# Altium PCB PCB2.PcbDoc
Units mm, origin at the board's own origin, x right, y up, seen from the top; angles counter-clockwise.
Board outline 152.4 x 72.9 mm, 2 copper layers (Top Layer, Bottom Layer); 42 components, 55 nets, 182 pads, 0 vias.
Unrouted connection lines stored in the file: 91.
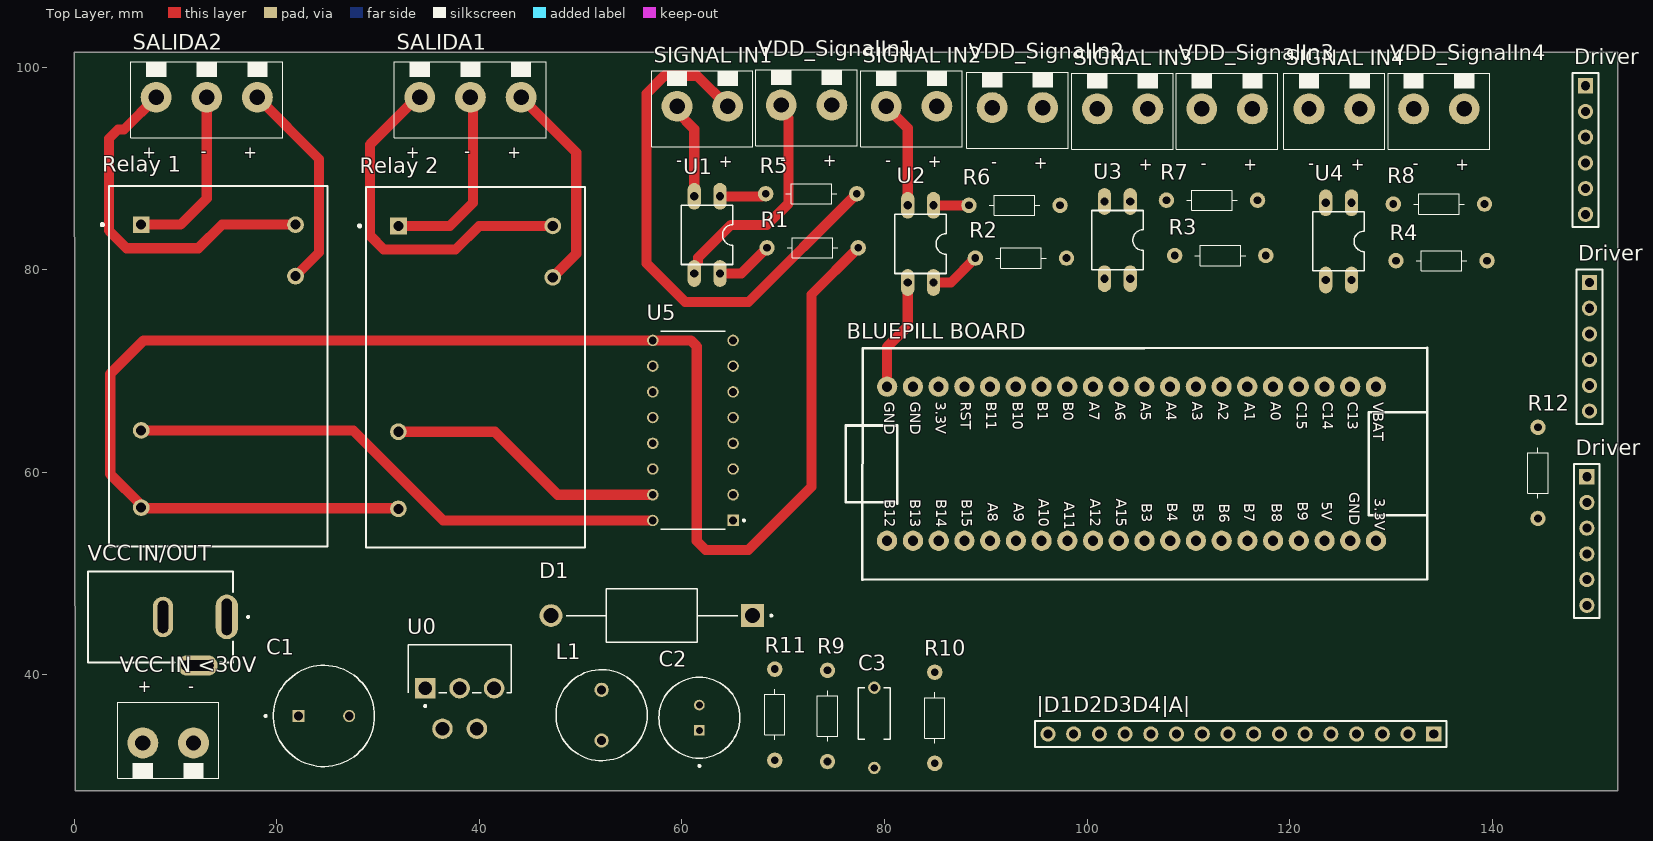
[diagram p0: Top Layer view]
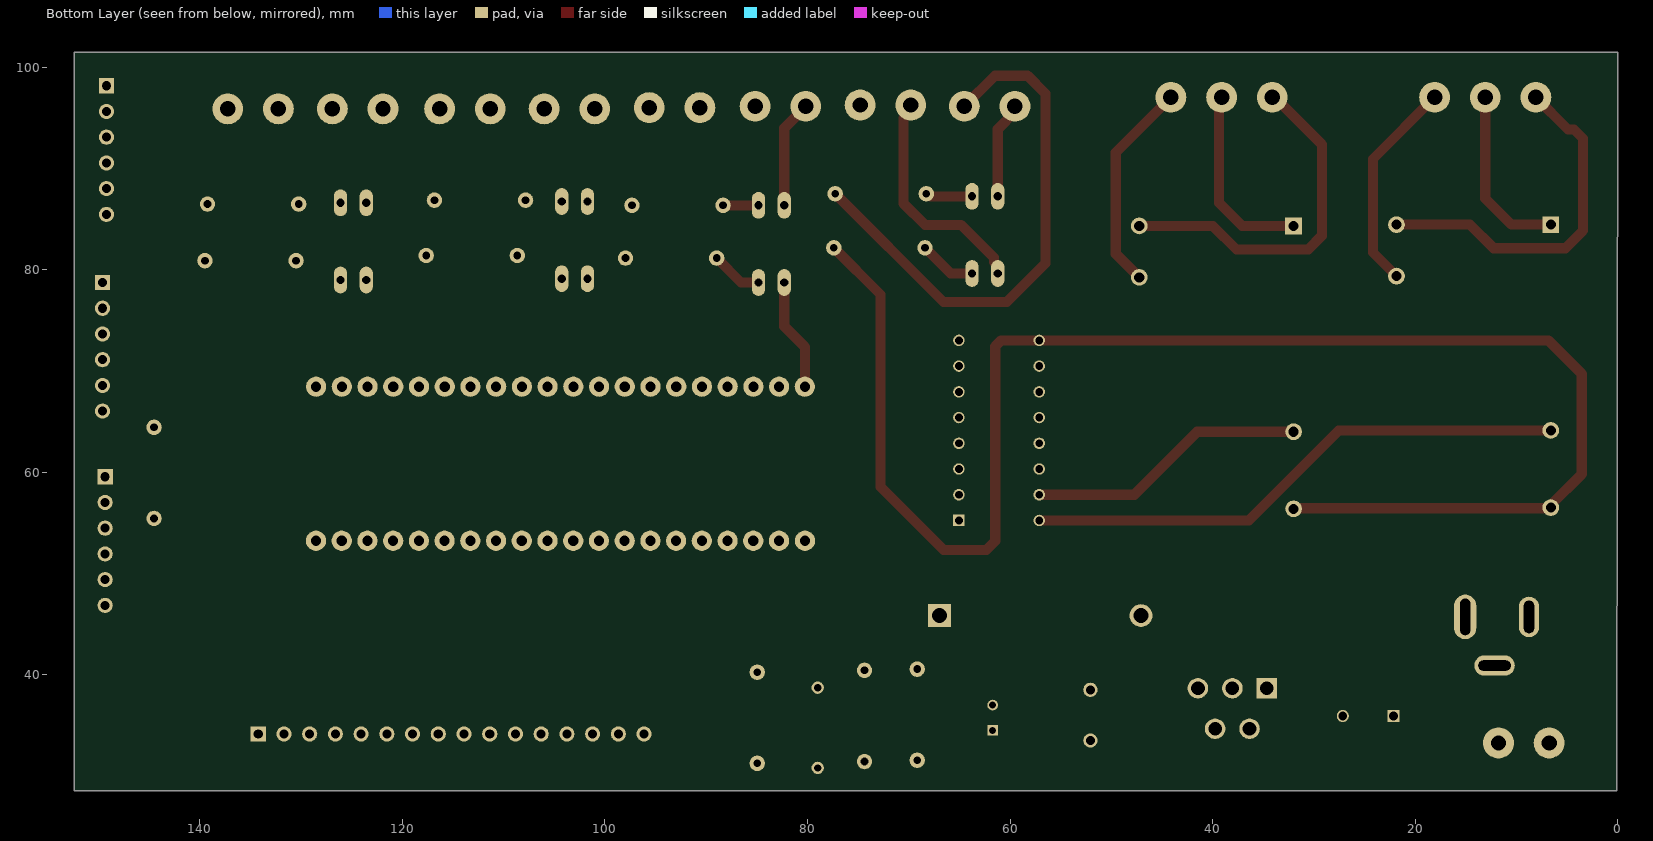
[diagram p1: Bottom Layer view, seen from below]

## Layer stack, top to bottom
Top Solder: solder mask 0.0102, Solder Resist, Dk 3.5
Top Layer: signal copper 0.0356
Dielectric 1: dielectric 0.32, FR-4, Dk 4.8
Bottom Layer: signal copper 0.0356
Bottom Solder: solder mask 0.0102, Solder Resist, Dk 3.5

## Board outline
0,101.473 152.4,101.473 152.4,28.575 0.107,28.575

## Design rules (kind name [scope] priority, off if disabled: settings)
Clearance [All] p1: gap=1 ignorepadtopadclearanceinfootprint=FALSE except(0: Arc-Hole Track-Hole SMDPad-Hole THPad-Hole Via-Hole Fill-Hole Poly-Hole Region-Hole Text-Hole)
PolygonConnect [All] p1: connectstyle=Relief reliefconductorwidth=0.254 reliefentries=4 polygonreliefangle="90 Angle" airgapwidth=0.254
RoomDefinition Placa_Main [InComponentClass('Placa_Main')] p1: confinementstyle=ConfineIn formatcopy=TRUE lockcomponents=FALSE outline 0.167,28.702 152.313,28.702 152.313,101.473 0.167,101.473
RoutingVias [All] p1: holewidth=0.711 width=1.27 viastyle="Through Hole" minholewidth=0.711 minwidth=1.27 maxholewidth=0.711 maxwidth=1.27
SolderMaskExpansion [All] p1: expansion=0.102 istentingtop=FALSE
Width [All] p1: maxlimit=3 minlimit=1 preferedwidth=1 minimp=50.000000 maximp=50.000000 favimp=50.000000
30 further rules are at their usual default settings.

## Classes and differential pairs
component class Placa_Main: "BLUEPILL BOARD" C1 C2 C3 D1 "Driver M2" "Driver M3" L1 R1 R2 R3 R4 R5 R6 R7 R8 R9 R10 R11 R12 "Relay 2" SALIDA1 SALIDA2 "SIGNAL IN1" "SIGNAL IN2" "SIGNAL IN3" "SIGNAL IN4" U0 U1 U2 U3 U4 U5 "VCC IN <30V" "VCC IN/OUT" VDD_SignalIn1 VDD_SignalIn2 VDD_SignalIn3 VDD_SignalIn4

## Components (designator, comment, footprint, x,y, rotation, side; value= is the part's Value field where it differs from the comment)
"BLUEPILL BOARD" "STM32F103C8T6" "Stm32 BluePill" 110.158,61.067 r270 top
C1 "470uFX50v" CAPPRD500W60D1000H2000 24.638,35.941 r0 top
C2 "220uF x 10v" CAPPRD250W45D800H500 61.722,35.767 r90 top
C3 "470nF" "CERAMIC CAPACITOR" 78.994,36.195 r270 top
D1 "1N5820G" DIOAD1990W125L900D530 57.023,45.847 r180 top
"Driver M2" "" HDR1X6 149.606,78.74 r270 top
"Driver M2" "" HDR1X6 149.225,98.171 r270 top
"Driver M3" "" HDR1X6 149.352,59.563 r270 top
L1 "33uH" IND_RLB9012-681KL 52.07,36.021 r90 top
R1 "330R" 330R_P8mm_0.25W 72.898,82.169 r180 top
R2 "330R" 330R_P8mm_0.25W 93.472,81.153 r180 top
R3 "330R" 330R_P8mm_0.25W 113.157,81.407 r180 top
R4 "330R" 330R_P8mm_0.25W 135.001,80.899 r180 top
R5 "100 ohm" 330R_P8mm_0.25W 72.771,87.503 r0 top
R6 "100 ohm" 330R_P8mm_0.25W 92.837,86.36 r0 top
R7 "100 ohm" 330R_P8mm_0.25W 112.34,86.868 r0 top
R8 "100 ohm" 330R_P8mm_0.25W 134.747,86.487 r180 top
R9 "1.7K" 330R_P8mm_0.25W 74.375,35.941 r270 top
R10 "1K" 330R_P8mm_0.25W 84.963,35.759 r90 top
R11 "ONLY IF YOU" 330R_P8mm_0.25W 69.168,36.068 r270 top
R12 "100 ohm" 330R_P8mm_0.25W 144.526,59.944 r270 top
"Relay 1" "3.3v" MODULE5B 14.224,70.485 r270 top
"Relay 2" "3.3v" MODULE5B 39.624,70.358 r270 top
SALIDA1 "" CONN3 41.616,97.028 r180 top
SALIDA2 "" CONN3 15.581,97.028 r180 top
"SIGNAL IN1" "" CONN2 62.016,96.139 r180 top
"SIGNAL IN2" "" CONN2 82.677,96.139 r180 top
"SIGNAL IN3" "" CONN2 103.505,95.885 r180 top
"SIGNAL IN4" "" CONN2 124.42,95.885 r180 top
U0 "LM2596T-ADJ/NOPB" TO170P1016X470X2092-5 34.651,38.671 r0 top
U1 "PC817" DIL04 62.484,83.439 r180 top
U2 "PC817" DIL04 83.566,82.55 r180 top
U3 "PC817" DIL04 102.997,82.931 r180 top
U4 "PC817" DIL04 124.841,82.804 r180 top
U5 "ULN2003AN" DIP794W45P254L1969H508Q16 61.087,64.135 r180 top
"VCC IN <30V" "" CONN2 9.271,33.274 r0 top
"VCC IN/OUT" "DCJ200" GCT_DCJ200-10-A-XX-K_REVA 8.509,45.72 r270 top
VDD_SignalIn1 "" CONN2 72.303,96.266 r180 top
VDD_SignalIn2 "" CONN2 93.131,96.012 r180 top
VDD_SignalIn3 "" CONN2 113.832,95.885 r180 top
VDD_SignalIn4 "" CONN2 134.747,95.885 r180 top
|D1D2D3D4|A| "Header 16" HDR1X16 134.239,34.163 r180 top

## Footprints (in the part's own frame and the unit in brackets; to place one, negate y for a bottom-side part, rotate by r counter-clockwise, add the part's x,y. Pads: shape width x height; smd on the part's side, far side on the other; paste and mask are expansions set on the pad)
330R_P8mm_0.25W [mil]
  round 60 hole 30: 1(-177.17,0) 2(177.16,0)
  silkscreen extent -98,-39 98,39, body extent -167,-50 167,50, height 104
CAPPRD250W45D800H500 [mm]
  round 1.05 hole 0.7: N(1.25,0)
  rect 1.05x1.05 hole 0.7: P(-1.25,0)
  silkscreen extent -4.85,-4 4,4, body extent -4,-4 4,4, height 5
CAPPRD500W60D1000H2000 [mm]
  round 1.2 hole 0.85: N(2.5,0)
  rect 1.2x1.2 hole 0.85: P(-2.5,0)
  silkscreen extent -5.85,-5 5,5, body extent -5,-5 5,5, height 20
"CERAMIC CAPACITOR" [mm]
  round 1.218 hole 0.71: 1(-2.54,0) 2(5.381,0)
  silkscreen extent -2.54,-1.59 2.54,1.59, body extent -2.79,-1.59 2.79,1.59, height 5.86
CONN2 [mil]
  round 120 hole 60: 1(-98.43,0) 2(98.43,0)
  silkscreen extent -197,-138 197,157, body extent -197,-138 197,157, height 394
CONN3 [mil]
  round 120 hole 60: 1(-98.43,0) 2(98.43,0) 3(295.28,0)
  silkscreen extent -197,-138 394,157, body extent -197,-154 394,161, height 394
DIL04 [mil]
  oval 52x104 hole 32: 1(-50,-150) 2(50,-150) 3(50,150) 4(-50,150)
  silkscreen extent -100,-115 100,115, body extent -91,-155 91,155, height 179
DIOAD1990W125L900D530 [mm]
  round 2.25 hole 1.5: A(9.95,0)
  rect 2.25x2.25 / inner round 2.25 / far side rect 2.25x2.25 hole 1.5: C(-9.95,0)
  silkscreen extent -11.9,-2.65 8.47,2.65, body extent -8.13,-2.65 8.13,2.65, height 5.3
DIP794W45P254L1969H508Q16 [mm]
  rect 1.13x1.13 / inner round 1.13 / far side rect 1.13x1.13 hole 0.78: 1(-3.97,8.89)
  round 1.13 hole 0.78: 2(-3.97,6.35) 3(-3.97,3.81) 4(-3.97,1.27) 5(-3.97,-1.27) 6(-3.97,-3.81) 7(-3.97,-6.35) 8(-3.97,-8.89) 9(3.97,-8.89) 10(3.97,-6.35) 11(3.97,-3.81) 12(3.97,-1.27) 13(3.97,1.27) 14(3.97,3.81) 15(3.97,6.35) 16(3.97,8.89)
  silkscreen extent -5.13,-9.77 3.18,9.77, body extent -4.15,-9.65 4.15,9.65, height 5.08
GCT_DCJ200-10-A-XX-K_REVA [mm]
  oval 4.4x2.2 hole 1 slot 3.6 at 0 deg: 1(0,6.55)
  oval 4x2 hole 1 slot 3.2 at 0 deg: 2(0,0.25)
  oval 2x4 hole 1 slot 3.2 at 90 deg: 3(4.8,3.65)
  silkscreen extent -4.5,-7.15 4.5,8.75, body extent -4.5,-7.15 5.05,7.15, height 11
HDR1X6 [mm] "Connector; Header; 6 Position"
  rect 1.5x1.5 hole 0.9: 1(0,0)
  round 1.5 hole 0.9: 2(2.54,0) 3(5.08,0) 4(7.62,0) 5(10.16,0) 6(12.7,0)
  silkscreen extent -1.27,-1.27 13.97,1.27
HDR1X16 [mm] "Connector; Header; 16 Position"
  rect 1.5x1.5 hole 0.9: 1(0,0)
  round 1.5 hole 0.9: 2(2.54,0) 3(5.08,0) 4(7.62,0) 5(10.16,0) 6(12.7,0) 7(15.24,0) 8(17.78,0) 9(20.32,0) 10(22.86,0) 11(25.4,0) 12(27.94,0) 13(30.48,0) 14(33.02,0) 15(35.56,0) 16(38.1,0)
  silkscreen extent -1.27,-1.27 39.37,1.27
IND_RLB9012-681KL [mm]
  round 1.408 hole 0.9: 1(-2.5,0) 2(2.5,0)
  silkscreen extent -4.5,-4.5 4.5,4.5, body extent -4.5,-4.5 4.5,4.5, height 12.2
MODULE5B [mm] "DIP; 5 Round Pins; Row Space 15.24 mm; Pitch 2.54 mm"
  rect 1.65x1.65 hole 1: 1(-13.97,-7.62)
  round 1.65 hole 1: 2(-13.97,7.62) 3(-8.89,7.62) 4(13.97,-7.62) 5(6.35,-7.62)
  silkscreen extent -17.8,-11.57 17.8,10.8, body extent -17.8,-10.8 17.8,10.8, height 14
"Stm32 BluePill" [mm]
  round 2 hole 1: 1(7.828,-29.908) 2(7.828,-27.343) 3(7.828,-24.803) 4(7.828,-22.263) 5(7.828,-19.723) 6(7.828,-17.183) 7(7.828,-14.643) 8(7.828,-12.103) 9(7.828,-9.563) 10(7.828,-7.023) 11(7.828,-4.483) 12(7.828,-1.943) 13(7.828,0.597) 14(7.828,3.137) 15(7.828,5.677) 16(7.828,8.217) 17(7.828,10.757) 18(7.828,13.297) 19(7.828,15.837) 20(7.828,18.377) 21(-7.386,18.366) 22(-7.386,15.826) 23(-7.386,13.286) 24(-7.386,10.746) 25(-7.386,8.206) 26(-7.386,5.666) 27(-7.386,3.126) 28(-7.386,0.586) 29(-7.386,-1.954) 30(-7.386,-4.494) 31(-7.386,-7.034) 32(-7.386,-9.574) 33(-7.386,-12.114) 34(-7.386,-14.654) 35(-7.386,-17.194) 36(-7.386,-19.734) 37(-7.386,-22.274) 38(-7.386,-24.814) 39(-7.386,-27.354) 40(-7.386,-29.894)
  silkscreen extent -11.22,-34 11.69,23.43, body extent -11.18,-33.27 11.68,24.29, height 12.31
TO170P1016X470X2092-5 [mm]
  rect 2.025x2.025 / inner round 2.025 / far side rect 2.025x2.025 hole 1.35: 1(0,0)
  round 2.025 hole 1.35: 2(1.7,-4) 3(3.4,0) 4(5.1,-4) 5(6.8,0)
  silkscreen extent -1.68,-1.85 8.48,4.28, body extent -1.58,-8 8.58,0.47, height 20.93

## Part data
"BLUEPILL BOARD": library part BluePill, "Designed By @Alixahedi"
C1: library part CAP-470uFX50v, "470ÂµF 50V Aluminum Electrolytic Capacitors Radial, Can 2000 Hrs @ 105Â°C", Package="RADIAL-2 Panasonic", Availability="Not in stock", Check_prices=https://www.snapeda.com/parts/EEUHD1H471/Panasonic/view-part/5785983/?ref=eda, MF=Panasonic, MP=EEUHD1H471, Price=None, SnapEDA_Link=https://www.snapeda.com/parts/EEUHD1H471/Panasonic/view-part/5785983/?ref=snap
C2: library part ECEA1AKS221I, "CAP ALUM 220UF 20% 10V RADIAL", Package="RADIAL-2 Panasonic", Availability="In Stock", Check_prices=https://www.snapeda.com/parts/ECE-A1AKS221I/Panasonic/view-part/2339032/?ref=eda, MF=Panasonic, MP=ECE-A1AKS221I, Price=None, Purchase-URL=https://pricing.snapeda.com/search/part/ECE-A1AKS221I/?ref=eda, SnapEDA_Link=https://www.snapeda.com/parts/ECE-A1AKS221I/Panasonic/view-part/2339032/?ref=snap
C3: library part SR655C474MARTR1, "SR Series 7.62 x 7.62 mm 470 nF 50 V Â±20 % Tolerance X7R Radial Lead/SkyCapÂ®", Package="Radial AVX", Check_prices=https://www.snapeda.com/parts/SR655C474MARTR1/AVX/view-part/?ref=eda, MF=AVX, MP=SR655C474MARTR1, SnapEDA_Link=https://www.snapeda.com/parts/SR655C474MARTR1/AVX/view-part/?ref=snap
D1: "ON Semi 1N5820G, Schottky Diode, 20V 3A, 2-Pin DO-201AD", Package="AXIAL LEAD-2 ON Semiconductor", Check_prices=https://www.snapeda.com/parts/1N5820G/Onsemi/view-part/?ref=eda, MF="ON Semiconductor", MP=1N5820G, SnapEDA_Link=https://www.snapeda.com/parts/1N5820G/Onsemi/view-part/?ref=snap
"Driver M2" "Driver M2" "Driver M3": library part "Header 6", "step,dir,enable,fault,vdd", LatestRevisionDate=17-Jul-2002, LatestRevisionNote="Re-released for DXP Platform.", Publisher="Altium Limited"
L1: library part RLB9012-681KL, Package=None, Availability=Unavailable, MP=RLB9012-681KL, Price=None
R1 R2 R3 R4 R5 R6 R7 R8 R9 R10 R11 R12: library part 330R_0.25W
"Relay 1" "Relay 2": library part Relay-SPDT, "Single-Pole Dual-Throw Relay", LatestRevisionDate=17-Jul-2002, LatestRevisionNote="Re-released for DXP Platform.", PackageReference=MODULE5B, Published=24-Mar-1999, Publisher="Altium Limited"
SALIDA1 SALIDA2: library part Bornera_3C
"SIGNAL IN1" "SIGNAL IN2" "SIGNAL IN3" "SIGNAL IN4" "VCC IN <30V" VDD_SignalIn1 VDD_SignalIn2 VDD_SignalIn3 VDD_SignalIn4: library part Bornera_2C
U0: "SIMPLE SWITCHERÂ® 4.5V to 40V, 3A Low Component Count Step-Down Regulator", Package="TO-220-5 Texas Instruments", Check_prices=https://www.snapeda.com/parts/LM2596T-ADJ/NOPB/Texas+Instruments/view-part/?ref=eda, MF="Texas Instruments", MP=LM2596T-ADJ/NOPB, SnapEDA_Link=https://www.snapeda.com/parts/LM2596T-ADJ/NOPB/Texas+Instruments/view-part/?ref=snap
U1 U2 U3 U4: library part PC817X3NSZ9F, "Optoisolator Transistor Output 5000Vrms 1 Channel 4-DIP", Package="DIP-4 Sharp Microelectronics", Check_prices=https://www.snapeda.com/parts/PC817X3NSZ9F/Sharp+Microelectronics/view-part/?ref=eda, MF="Sharp Microelectronics", MP=PC817X3NSZ9F, SnapEDA_Link=https://www.snapeda.com/parts/PC817X3NSZ9F/Sharp+Microelectronics/view-part/?ref=snap
U5: "50-V, 7-ch darlington transistor array, -20C to 70C", Package="PDIP-16 Texas Instruments", Check_prices=https://www.snapeda.com/parts/ULN2003AN/Texas+Instruments/view-part/?ref=eda, MF="Texas Instruments", MP=ULN2003AN, SnapEDA_Link=https://www.snapeda.com/parts/ULN2003AN/Texas+Instruments/view-part/?ref=snap
"VCC IN/OUT": library part DCJ200-10-A-XX-K_REVA, "Power Barrel Connector Jack 2.05mm ID (0.081), 5.50mm OD (0.217) Through Hole, Right Angle", Package=None, Check_prices=https://www.snapeda.com/parts/DCJ200-10-A-K1-K/Global+Connector+Technology/view-part/?ref=eda, MF="Global Connector Technology", MP=DCJ200-10-A-K1-K, SnapEDA_Link=https://www.snapeda.com/parts/DCJ200-10-A-K1-K/Global+Connector+Technology/view-part/?ref=snap
|D1D2D3D4|A|: "Header, 16-Pin", LatestRevisionDate=17-Jul-2002, LatestRevisionNote="Re-released for DXP Platform.", Publisher="Altium Limited"

## Nets (pads, with @x,y where several pads share a name; then routed paths per layer and width w, separated by ;. In a path a pad name is that pad's centre, name@x,y a point inside that pad or via, vN(x,y) a via of type N, cw(c..) or ccw(c..) an arc to the next point about the centre after c; other vN are vias at no path point)
+3.3v: C2.P C3.2 L1.1 R9.2 R11.2
GND: "BLUEPILL BOARD.40" "Driver M2.6" "Driver M3.6" "VCC IN <30V.2" "VCC IN/OUT.2" "VCC IN/OUT.3" C1.N C2.N D1.A U0.3 U0.5 U1.3 U2.3 U3.3 U4.3 U5.3 U5.4 U5.5 U5.6 U5.7 U5.8 VDD_SignalIn1.2 VDD_SignalIn2.2 VDD_SignalIn3.2 VDD_SignalIn4.2 |D1D2D3D4|A|.1 | length 34
  Top Layer w1: U1.3 61.214,80.376 61.594,80.756 61.594,81.184 64.84,84.431 68.398,84.431 70.533,86.566 70.533,94.982 69.803,95.712 VDD_SignalIn1.2 ; 80.264,68.453 80.264,72.387 82.296,74.419 U2.3
Net: |D1D2D3D4|A|.3 |D1D2D3D4|A|.4
"NetBLUEPILL BOARD_1": "BLUEPILL BOARD.1" U5.1
"NetBLUEPILL BOARD_2": "BLUEPILL BOARD.2" U5.2
"NetBLUEPILL BOARD_3": "BLUEPILL BOARD.3" R1.2 U1.4 | length 5.7
  Top Layer w1: U1.4 65.858,79.629 R1.2
"NetBLUEPILL BOARD_4": "BLUEPILL BOARD.4" R2.2 U2.4 | length 5.1
  Top Layer w1: U2.4 86.559,78.74 R2.2
"NetBLUEPILL BOARD_5": "BLUEPILL BOARD.5" R3.2 U3.4
"NetBLUEPILL BOARD_6": "BLUEPILL BOARD.6" R4.2 U4.4
"NetBLUEPILL BOARD_7": "BLUEPILL BOARD.7" |D1D2D3D4|A|.15
"NetBLUEPILL BOARD_8": "BLUEPILL BOARD.8" |D1D2D3D4|A|.14
"NetBLUEPILL BOARD_9": "BLUEPILL BOARD.9" |D1D2D3D4|A|.13
"NetBLUEPILL BOARD_10": "BLUEPILL BOARD.10" |D1D2D3D4|A|.12
"NetBLUEPILL BOARD_11": "BLUEPILL BOARD.11" |D1D2D3D4|A|.11
"NetBLUEPILL BOARD_12": "BLUEPILL BOARD.12" |D1D2D3D4|A|.10
"NetBLUEPILL BOARD_13": "BLUEPILL BOARD.13" |D1D2D3D4|A|.9
"NetBLUEPILL BOARD_14": "BLUEPILL BOARD.14" |D1D2D3D4|A|.8
"NetBLUEPILL BOARD_15": "BLUEPILL BOARD.15" |D1D2D3D4|A|.7
"NetBLUEPILL BOARD_16": "BLUEPILL BOARD.16" |D1D2D3D4|A|.6
"NetBLUEPILL BOARD_17": "BLUEPILL BOARD.17" |D1D2D3D4|A|.5
"NetBLUEPILL BOARD_24": "BLUEPILL BOARD.24" "Driver M2.4" "Driver M3.4" R12.2
"NetBLUEPILL BOARD_25": "BLUEPILL BOARD.25" "Driver M2.1"@149.225,98.171
"NetBLUEPILL BOARD_26": "BLUEPILL BOARD.26" "Driver M2.2"@149.225,95.631
"NetBLUEPILL BOARD_27": "BLUEPILL BOARD.27" "Driver M2.3"@149.225,93.091
"NetBLUEPILL BOARD_28": "BLUEPILL BOARD.28" "Driver M2.1"@149.606,78.74
"NetBLUEPILL BOARD_29": "BLUEPILL BOARD.29" "Driver M2.2"@149.606,76.2
"NetBLUEPILL BOARD_30": "BLUEPILL BOARD.30" "Driver M2.3"@149.606,73.66
"NetBLUEPILL BOARD_31": "BLUEPILL BOARD.31" "Driver M3.3"
"NetBLUEPILL BOARD_32": "BLUEPILL BOARD.32" "Driver M3.2"
"NetBLUEPILL BOARD_33": "BLUEPILL BOARD.33" |D1D2D3D4|A|.16
"NetBLUEPILL BOARD_34": "BLUEPILL BOARD.34" "Driver M3.1"
"NetBLUEPILL BOARD_38": "BLUEPILL BOARD.38" "Driver M2.5" "Driver M3.5" "Relay 1.4" "Relay 2.4" R1.1 R2.1 R3.1 R4.1 R12.1 U5.9 VDD_SignalIn1.1 VDD_SignalIn2.1 VDD_SignalIn3.1 VDD_SignalIn4.1 |D1D2D3D4|A|.2 | length 158.5
  Top Layer w1: 32.004,56.388 31.941,56.451 6.667,56.451 6.604,56.515 6.604,56.769 3.556,59.817 3.556,69.723 6.858,73.025 U5.9 60.882,73.025 61.468,72.439 61.468,53.213 62.357,52.324 66.548,52.324 72.788,58.564 72.788,77.559 R1.1
NetC1_P: "VCC IN <30V.1" "VCC IN/OUT.1" C1.P U0.1
NetC3_1: C3.1 R9.1 R10.2 R11.1 U0.4
NetD1_C: D1.C L1.2 U0.2
NetR5_1: R5.1 U1.1 | length 4.6
  Top Layer w1: U1.1 67.875,87.249 68.129,87.503 R5.1
NetR5_2: "SIGNAL IN1.1" R5.2 | length 53.6
  Top Layer w1: 64.516,96.139 61.492,99.163 58.263,99.163 56.492,97.392 56.492,80.635 60.319,76.808 66.576,76.808 R5.2
NetR6_1: R6.1 U2.1 | length 3.5
  Top Layer w1: U2.1 R6.1
NetR6_2: "SIGNAL IN2.1" R6.2
NetR7_1: R7.1 U3.1
NetR7_2: "SIGNAL IN3.1" R7.2
NetR8_1: R8.1 U4.1
NetR8_2: "SIGNAL IN4.1" R8.2
"NetRelay 1_1": "Relay 1.1" SALIDA2.2 | length 17.5
  Top Layer w1: 6.604,84.455 10.495,84.455 13.081,87.041 SALIDA2.2
"NetRelay 1_2": "Relay 1.2" SALIDA2.3 | length 35.5
  Top Layer w1: SALIDA2.3 4.906,93.853 4.318,93.853 3.429,92.964 3.429,83.859 5.158,82.13 12.25,82.13 14.575,84.455 21.844,84.455
"NetRelay 1_3": "Relay 1.3" SALIDA2.1 | length 21.1
  Top Layer w1: SALIDA2.1 24.169,90.94 24.169,81.7 21.844,79.375
"NetRelay 1_5": "Relay 1.5" U5.16 | length 54.2
  Top Layer w1: 6.604,64.135 27.545,64.135 36.435,55.245 U5.16
"NetRelay 2_1": "Relay 2.1" SALIDA1.2 | length 18.8
  Top Layer w1: 32.004,84.328 37.084,84.328 39.37,86.614 39.37,96.774 SALIDA1.2
"NetRelay 2_2": "Relay 2.2" SALIDA1.3 | length 35.4
  Top Layer w1: SALIDA1.3 33.86,97.028 29.21,92.378 29.21,83.351 30.558,82.003 37.65,82.003 39.975,84.328 47.244,84.328
"NetRelay 2_3": "Relay 2.3" SALIDA1.1 | length 21
  Top Layer w1: SALIDA1.1 49.569,91.575 49.569,81.573 47.244,79.248
"NetRelay 2_5": "Relay 2.5" U5.15 | length 27.7
  Top Layer w1: 32.004,64.008 41.519,64.008 47.742,57.785 U5.15
"NetSIGNAL IN1_2": "SIGNAL IN1.2" U1.2 | length 9.6
  Top Layer w1: 59.516,96.139 59.516,95.585 61.214,93.887 U1.2
"NetSIGNAL IN2_2": "SIGNAL IN2.2" U2.2 | length 10.7
  Top Layer w1: 80.177,96.139 80.177,96.1 82.296,93.981 U2.2
"NetSIGNAL IN3_2": "SIGNAL IN3.2" U3.2
"NetSIGNAL IN4_2": "SIGNAL IN4.2" U4.2
pads on no net: "BLUEPILL BOARD.18" "BLUEPILL BOARD.19" "BLUEPILL BOARD.20" "BLUEPILL BOARD.21" "BLUEPILL BOARD.22" "BLUEPILL BOARD.23" "BLUEPILL BOARD.35" "BLUEPILL BOARD.36" "BLUEPILL BOARD.37" "BLUEPILL BOARD.39" R10.1 U5.10 U5.11 U5.12 U5.13 U5.14

## Text inside footprints (layer, text, board x,y; h text height)
"BLUEPILL BOARD": Top Overlay "B12" at 79.703,57.318 h1.78 r270; Top Overlay "GND" at 79.646,66.98 h1.78 r270; Top Overlay "B13" at 82.212,57.328 h1.78 r270; Top Overlay "GND" at 82.212,66.98 h1.78 r270; Top Overlay "A1" at 115.238,66.909 h1.78 r270; Top Overlay "A0" at 117.797,66.98 h1.78 r270; Top Overlay "C14" at 122.928,66.98 h1.78 r270; Top Overlay "C13" at 125.417,66.98 h1.78 r270; Top Overlay "C15" at 120.362,66.98 h1.78 r270; Top Overlay "B6" at 112.717,56.916 h1.78 r270; Top Overlay "B4" at 107.567,56.98 h1.78 r270; Top Overlay "B7" at 115.187,56.947 h1.78 r270; Top Overlay "B14" at 84.783,57.348 h1.78 r270; Top Overlay "B5" at 110.152,56.947 h1.78 r270; Top Overlay "VBAT" at 127.938,66.907 h1.78 r270; Top Overlay "A10" at 94.887,57.381 h1.78 r270; Top Overlay "A12" at 99.973,57.381 h1.78 r270; Top Overlay "A15" at 102.557,57.381 h1.78 r270; Top Overlay "A9" at 92.397,56.98 h1.78 r270; Top Overlay "B3" at 105.047,56.947 h1.78 r270; Top Overlay "A11" at 97.407,57.094 h1.78 r270; Top Overlay "A8" at 89.832,57.011 h1.78 r270; Top Overlay "B15" at 87.267,57.318 h1.78 r270; Top Overlay "3.3V" at 84.701,66.98 h1.78 r270; Top Overlay "B1" at 94.766,66.98 h1.78 r270; Top Overlay "B0" at 97.325,66.98 h1.78 r270; Top Overlay "A7" at 99.871,66.98 h1.78 r270; Top Overlay "A6" at 102.455,66.98 h1.78 r270; Top Overlay "B11" at 89.711,66.98 h1.78 r270; Top Overlay "B10" at 92.296,66.98 h1.78 r270; Top Overlay "RST" at 87.165,66.98 h1.78 r270; Top Overlay "A4" at 107.466,66.98 h1.78 r270; Top Overlay "A3" at 110.05,66.98 h1.78 r270; Top Overlay "A2" at 112.596,66.98 h1.78 r270; Top Overlay "A5" at 104.945,66.98 h1.78 r270; Top Overlay "GND" at 125.544,58.019 h1.78 r270; Top Overlay "3.3V" at 128.059,57.455 h1.78 r270; Top Overlay "B8" at 117.899,56.947 h1.78 r270; Top Overlay "B9" at 120.439,57.074 h1.78 r270; Top Overlay "5V" at 122.852,57.074 h1.78 r270
SALIDA1: Top Overlay "-" at 39.116,92.028 h1.2 r180; Top Overlay "+" at 44.116,92.028 h1.2 r180; Top Overlay "+" at 34.116,92.028 h1.2 r180
SALIDA2: Top Overlay "-" at 13.081,92.028 h1.2 r180; Top Overlay "+" at 18.081,92.028 h1.2 r180; Top Overlay "+" at 8.081,92.028 h1.2 r180
"SIGNAL IN1": Top Overlay "-" at 60.016,91.139 h1.2 r180; Top Overlay "+" at 65.016,91.139 h1.2 r180
"SIGNAL IN2": Top Overlay "-" at 80.677,91.139 h1.2 r180; Top Overlay "+" at 85.677,91.139 h1.2 r180
"SIGNAL IN3": Top Overlay "-" at 101.505,90.885 h1.2 r180; Top Overlay "+" at 106.505,90.885 h1.2 r180
"SIGNAL IN4": Top Overlay "-" at 122.42,90.885 h1.2 r180; Top Overlay "+" at 127.42,90.885 h1.2 r180
"VCC IN <30V": Top Overlay "-" at 11.271,38.274 h1.2; Top Overlay "+" at 6.271,38.274 h1.2
VDD_SignalIn1: Top Overlay "-" at 70.303,91.266 h1.2 r180; Top Overlay "+" at 75.303,91.266 h1.2 r180
VDD_SignalIn2: Top Overlay "-" at 91.131,91.012 h1.2 r180; Top Overlay "+" at 96.131,91.012 h1.2 r180
VDD_SignalIn3: Top Overlay "-" at 111.832,90.885 h1.2 r180; Top Overlay "+" at 116.832,90.885 h1.2 r180
VDD_SignalIn4: Top Overlay "-" at 132.747,90.885 h1.2 r180; Top Overlay "+" at 137.747,90.885 h1.2 r180